# Altium PCB RFFE-Ver1.PcbDoc (part 2 of 2)
Units mm, origin at the board's own origin, x right, y up, seen from the top; angles counter-clockwise.
Board outline 405.96 x 196.35 mm, 6 copper layers (Top Layer, Internal Plane 1, Mid-Layer 1, Mid-Layer 2, Internal Plane 2, Bottom Layer); 512 components, 366 nets, 2013 pads, 0 vias.
Unrouted connection lines stored in the file: 1522.
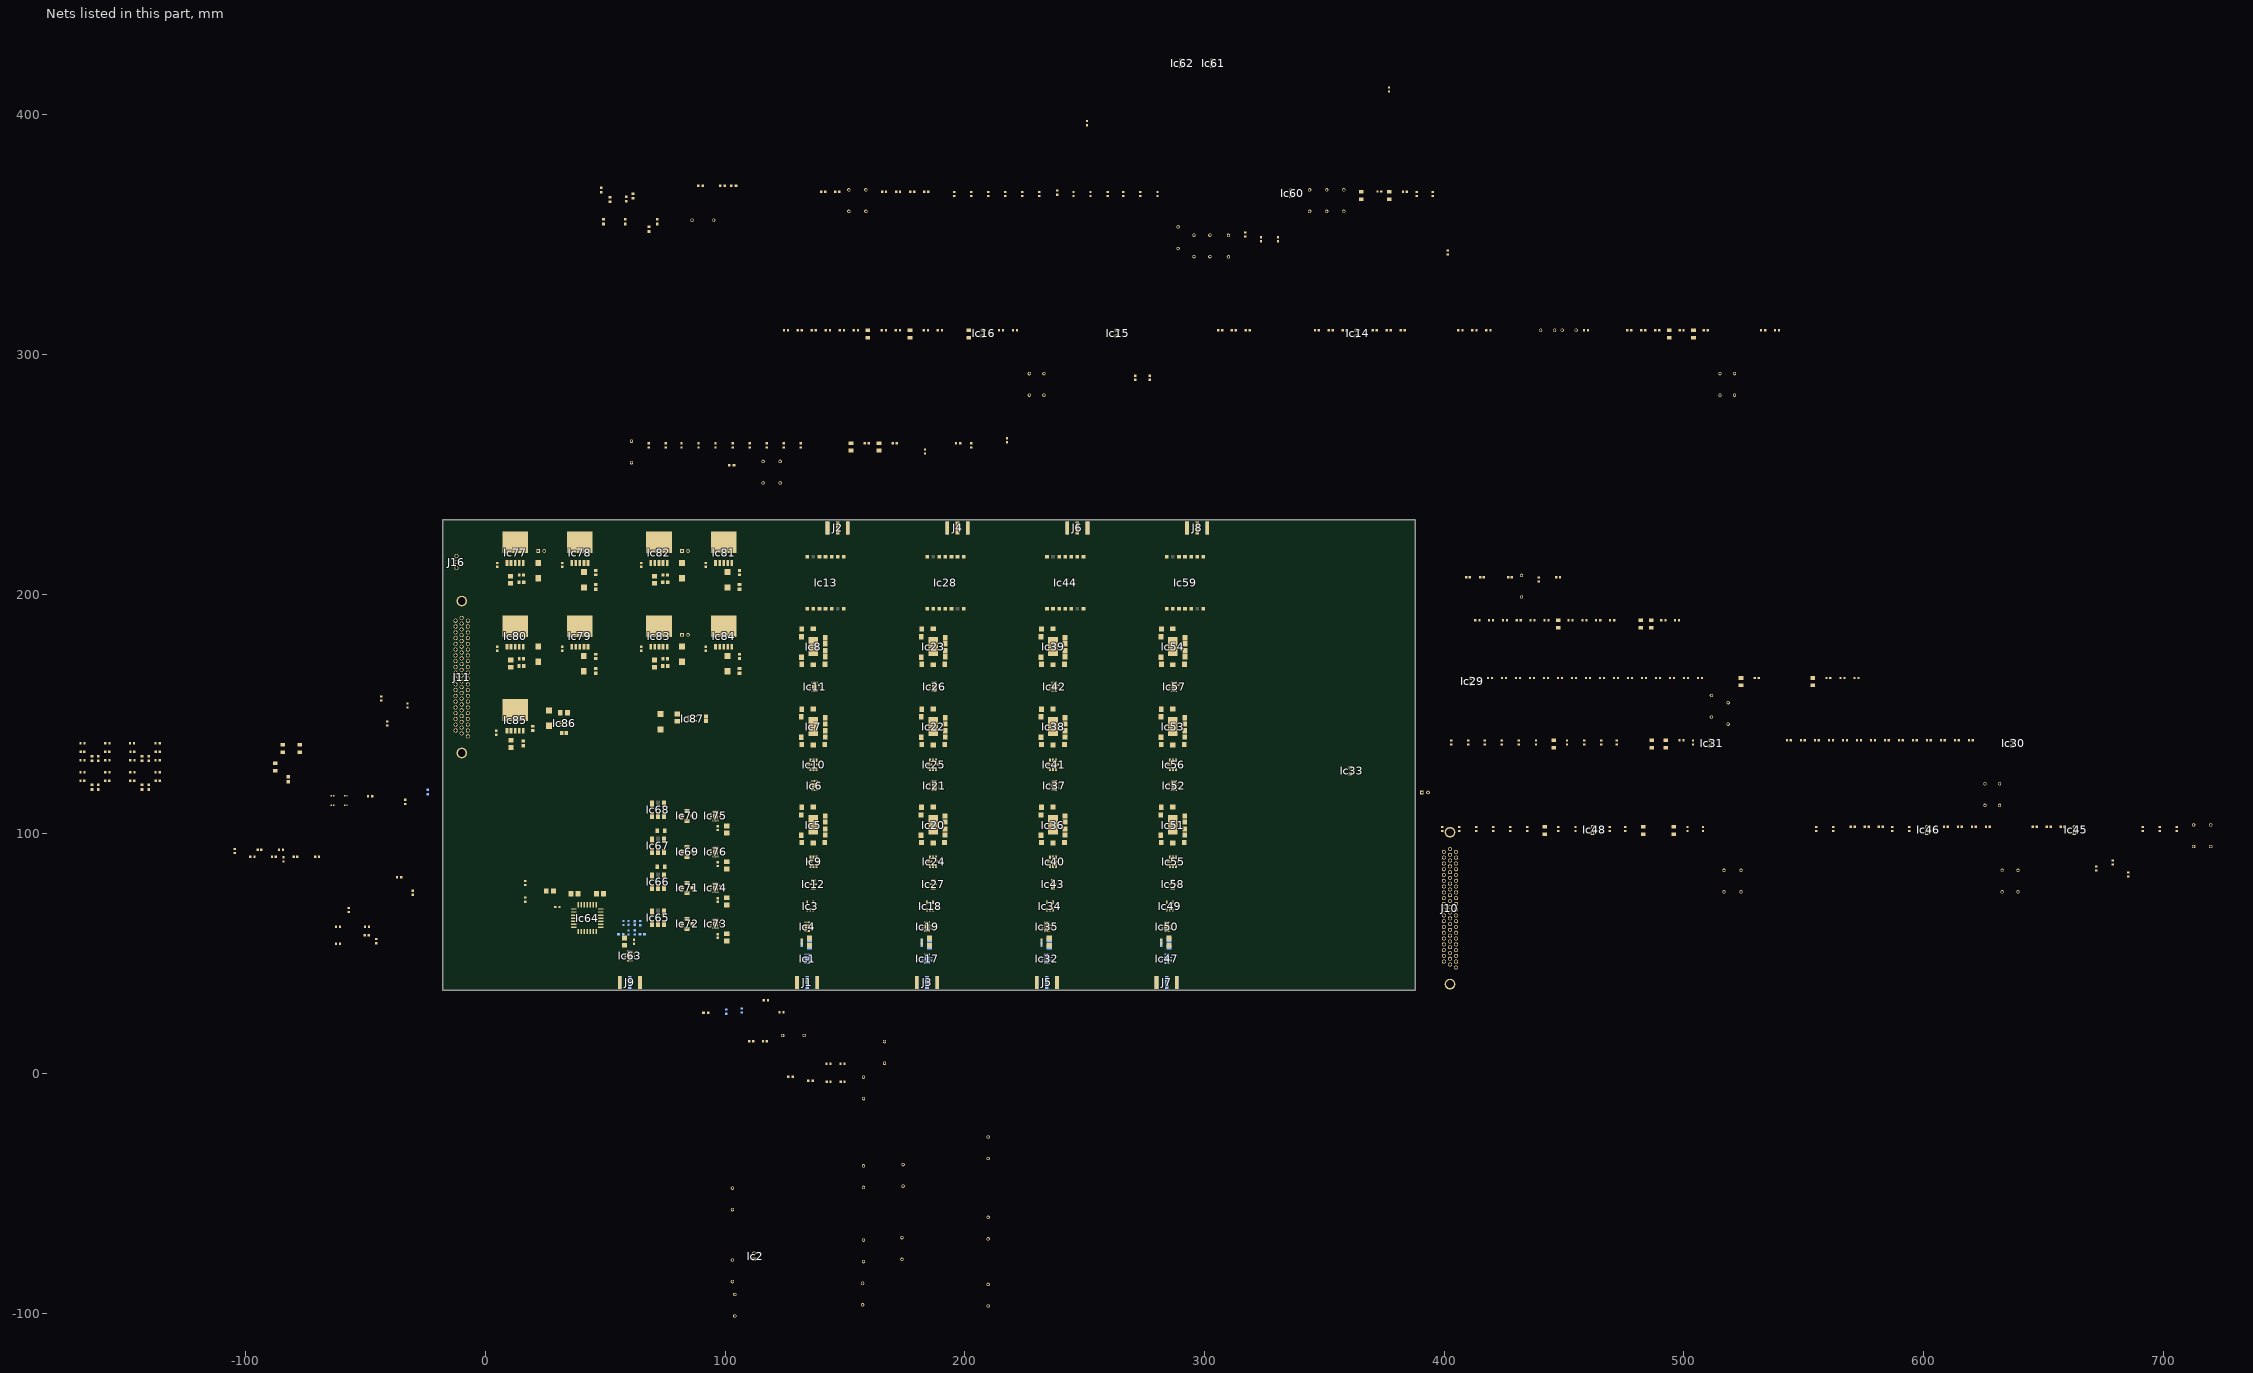
[diagram p4: the nets of this part, all layers, seen from the top]

## Part data
C1 C2 C3 C4 C6 C22 C23 C24 C25 C27 C43 C44 C45 C46 C48 C64 C65 C66 C67 C69: library part GRM31C5C1E104JA01L, "CAP CER 0.1UF 25V 5% NP0 1206"
C5 C7 C20 C21 C26 C28 C41 C42 C47 C49 C62 C63 C68 C70 C82 C84 C94 C104 C105 C106 C107: "CAP CER 100PF 50V 5% NP0 0603"
C8 C9 C10 C11 C12 C13 C14 C15 C16 C17 C29 C30 C31 C32 C33 C34 C35 C36 C37 C38 C50 C51 C52 C53 C54 C55 C56 C57 C58 C59 C72 C73 C74 C75 C76 C77 C78 C79 C80 C81 C87 C88 C89 C90 C91 C92 C96 C97 C98 C99 C100 C101 C102 C103: "CAP CER 47PF 50V 5% NP0 0603"
C18 C19 C39 C40 C60 C61 C71 C83 C85 C86 C93 C95 C108 C109 C110 C111: library part T495B475K016ZTE800, "CAP TANT 4.7UF 16V 10% 1411"
C112 C113 C114 C115 C118 C119 C120 C121 C127 C129: library part T495D336K016ATE150, "CAP TANT 33UF 16V 10% 2917"
C116 C117 C122 C123 C124 C125 C128: library part T520B106M016ATE100, "CAP TANT 10UF 16V 20% 1411"
C126 C130: library part C2012C0G1H103J/0.60, "CAP CER 10000PF 50V 5% NP0 0805"
D1 D2 D3 D4: "DIODE SCHOTTKY SS 30V 100MA 2VMN"
Ic1 Ic4 Ic17 Ic19 Ic32 Ic35 Ic47 Ic50 Ic63 Ic73 Ic74 Ic75 Ic76: library part Minicircuits-HSWA2-30DR+, "Absoptive RF Switch SPDT"
Ic2 Ic14 Ic15 Ic16 Ic29 Ic30 Ic31 Ic33 Ic45 Ic46 Ic48 Ic60 Ic61 Ic62: library part PPG101A1RD
Ic3 Ic18 Ic34 Ic49: library part Minicircuits-SBTC-2-10L, "Power Splitter 2 way"
Ic5 Ic7 Ic8 Ic20 Ic22 Ic23 Ic36 Ic38 Ic39 Ic51 Ic53 Ic54: library part Minicircuits-TAMP-72LN+, "LNA 20 dB Low Noise Figure"
Ic6 Ic11 Ic21 Ic26 Ic37 Ic42 Ic52 Ic57: library part Minicircuits-DAT-31R5-SP+, "Serial Digital Step Attenuator 31.5 step:0.5dB"
Ic9 Ic10 Ic24 Ic25 Ic40 Ic41 Ic55 Ic56: library part TST-TA0568A, "Band Pass Filter FC475MHz 3dB@12MHz"
Ic12 Ic27 Ic43 Ic58: library part Minicircuits-LFCN-530+, "Low Pass Filter 3dB@530MHz"
Ic13 Ic28 Ic44 Ic59: library part Minicircuits-BPF-C495+, "Band Pass Filter FC495MHz 3dB@50MHz"
Ic64: library part Minicircuits-GSWA-4-30DR, "SP4T Absorptive GaAs Switch"
Ic65 Ic66 Ic67 Ic68: library part Minicircuits-ADC-10-4, "Coupler 10 dB"
Ic69: library part Minicircuits-PAT-1+, "Fixed Attenuator 1 dB"
Ic70: library part Minicircuits-PAT-0+, "Fixed Attenuator 0 dB"
Ic71: library part Minicircuits-PAT-2+, "Fixed Attenuator 2 dB"
Ic72: library part Minicircuits-PAT-3+, "Fixed Attenuator 3 dB"
Ic77 Ic78 Ic79 Ic80 Ic81 Ic82 Ic83 Ic84 Ic85: library part LT1764AEQ#PBF
Ic86: "IC LDO REG HI-PSRR 3V SOT23-5"
Ic87: "IC LDO REG NEG LOWNOISE TSOT23-5"
J1 J2 J3 J4 J5 J6 J7 J8 J9: library part 132289RP, "CONN RCPT BLKHD SMA REV POL PCB"
J10 J11: library part 5749639-1, "CONN D-SUB PLUG R/A 62POS 30GOLD"
J12 J13 J14 J15: library part 4-103321-4, "CONN HEADR BRKWAY .100 2POS STR"
J16: library part 1881561, "CONN TERM BLK HDR 2.5MM 3POS"
R1 R2 R3 R4 R5 R6 R7 R8 R9 R10 R11 R12 R13 R14 R37 R38 R39 R40 R41 R42 R45 R46 R47 R48 R51 R52 R53 R54 R55 R56 R57 R58 R59 R60 R61 R62 R63 R64 R84 R85 R86 R87 R88 R89 R95 R96 R97 R98 R99 R100 R101 R102 R103 R104 R105 R106 R107 R108 R109 R110 R111 R112 R135 R136 R137 R138 R139 R140 R143 R144 R145 R146 R149 R150 R151 R152 R153 R154 R155 R156 R157 R158 R159 R160 R161 R162 R184 R185 R186 R187 R188 R189 R193 R194 R195 R196 R201 R202 R203 R205 R213 R214 R215 R216 R217 R218 R241 R242 R243 R244 R245 R246 R247 R248: "RES 10K OHM .15W 0.1% 0603 SMD"
R15 R16 R17 R25 R26 R34 R35 R36 R43 R44 R49 R50 R68 R69 R70 R72 R73 R90 R91 R92 R93 R94 R115 R116 R117 R120 R121 R132 R133 R134 R141 R142 R147 R148 R167 R168 R169 R170 R171 R172 R173 R190 R191 R192: "RES 46.4 OHM 1% 50PPM 1/2W"
R18 R19 R20 R21 R65 R66 R67 R71 R113 R114 R118 R119 R163 R164 R165 R166 R204 R206 R225 R226 R227 R228 R229 R230 R231 R232: library part ERJ-3GEY0R00V, "RES 0.0 OHM 1/10W 0603 SMD"
R22 R23 R24 R27 R28 R29 R30 R31 R32 R33 R74 R75 R76 R77 R78 R79 R80 R81 R82 R83 R122 R123 R124 R125 R126 R127 R128 R129 R130 R131 R174 R175 R176 R177 R178 R179 R180 R181 R182 R183 R207 R208 R209 R210 R211 R212 R233 R234 R235 R236 R237 R238 R239 R240: "RES 100 OHM 125MW .1% 0603 SMD"
R197 R198 R199 R200: "RES 10 OHM 1/10W 5% 0603 SMD"
R219: library part ERJ-6ENF1000V, "RES 100 OHM 1/8W 1% 0805 SMD"
R220 R221 R222 R223 R224: library part CHF1206CNT500LW, "RES 50 OHM 20W 5% 1206 SMD"
R249 R250 R251 R252 R261 R262 R263 R264 R273: "RES 0.0 OHM 1/10W 0603 SMD"
R253 R254 R255 R256 R265 R266 R267 R268 R274: library part ERA-6AEB472V, "RES 4.7K OHM 1/8W .1% 0805 SMD"
R257 R259 R269 R271 R275: library part ERA-6AEB102V, "RES 1.0K OHM 1/8W .1% 0805 SMD"
R258 R260 R270 R272: library part ERA-6AEB152V, "RES 1.5K OHM 1/8W .1% 0805 SMD"

## Nets (pads, with @x,y where several pads share a name; then routed paths per layer and width w, separated by ;. In a path a pad name is that pad's centre, name@x,y a point inside that pad or via, vN(x,y) a via of type N, cw(c..) or ccw(c..) an arc to the next point about the centre after c; other vN are vias at no path point)
3VGND: C1.1 C2.1 C3.1 C4.2 C5.2 C6.2 C7.2 C8.2 C9.2 C10.2 C11.2 C12.2 C13.2 C14.1 C17.1 C18.2 C19.2 C20.2 C21.2 C22.1 C23.1 C24.1 C25.2 C26.2 C27.2 C28.2 C29.2 C30.2 C31.2 C32.2 C33.2 C34.2 C36.1 C37.1 C39.2 C40.2 C41.2 C42.2 C43.1 C44.1 C45.1 C46.2 C47.2 C48.2 C49.2 C50.2 C51.2 C52.2 C53.2 C54.2 C55.2 C56.1 C59.1 C60.2 C61.2 C62.2 C63.2 C64.1 C65.1 C66.1 C67.2 C68.2 C69.2 C70.2 C71.2 C72.2 C73.2 C74.2 C75.1 C77.2 C78.2 C79.2 C81.1 C82.2 C83.2 C84.2 C85.2 C86.1 C87.2 C88.2 C89.2 C93.2 C94.2 C95.2 C96.2 C97.2 C98.2 C99.2 C100.2 C101.2 C102.2 C103.2 C104.2 C105.2 C106.2 C107.2 C108.2 C109.2 C110.2 C111.2 C112.2 C113.2 C114.2 C115.2 C116.2 C117.2 C118.2 C119.2 C120.2 C121.2 C122.2 C123.2 C124.1 C125.2 C127.1 C128.2 C129.2 C130.2 Ic1.1 Ic1.2 Ic1.4 Ic1.5 Ic1.6 Ic1.7 Ic1.9 Ic1.10 Ic1.11 Ic1.12 Ic1.14 Ic1.15 Ic1.19 Ic1.21 Ic3.1 Ic3.2 Ic4.1 Ic4.2 Ic4.4 Ic4.5 Ic4.6 Ic4.7 Ic4.9 Ic4.10 Ic4.11 Ic4.12 Ic4.14 Ic4.15 Ic4.19 Ic4.21 Ic5.1 Ic5.2 Ic5.3 Ic5.4 Ic5.6 Ic5.8 Ic5.9 Ic5.11 Ic5.12 Ic6.10 Ic6.11 Ic6.12 Ic6.18 Ic6.21 Ic7.1 Ic7.2 Ic7.3 Ic7.4 Ic7.6 Ic7.8 Ic7.9 Ic7.11 Ic7.12 Ic8.1 Ic8.2 Ic8.3 Ic8.4 Ic8.6 Ic8.8 Ic8.9 Ic8.11 Ic8.12 Ic9.1 Ic9.3 Ic9.4 Ic9.5 Ic9.7 Ic9.8 Ic10.1 Ic10.3 Ic10.4 Ic10.5 Ic10.7 Ic10.8 Ic11.10 Ic11.11 Ic11.12 Ic11.18 Ic11.21 Ic12.2 Ic12.4 Ic13.1 Ic13.3 Ic13.4 Ic13.5 Ic13.7 Ic13.8 Ic13.10 Ic13.11 Ic13.12 Ic13.14 Ic17.1 Ic17.2 Ic17.4 Ic17.5 Ic17.6 Ic17.7 Ic17.9 Ic17.10 Ic17.11 Ic17.12 Ic17.14 Ic17.15 Ic17.19 Ic17.21 Ic18.1 Ic18.2 Ic19.1 Ic19.2 Ic19.4 Ic19.5 Ic19.6 Ic19.7 Ic19.9 Ic19.10 Ic19.11 Ic19.12 Ic19.14 Ic19.15 Ic19.19 Ic19.21 Ic20.1 Ic20.2 Ic20.3 Ic20.4 Ic20.6 Ic20.8 Ic20.9 Ic20.11 Ic20.12 Ic21.10 Ic21.11 Ic21.12 Ic21.18 Ic21.21 Ic22.1 Ic22.2 Ic22.3 Ic22.4 Ic22.6 Ic22.8 Ic22.9 Ic22.11 Ic22.12 Ic23.1 Ic23.2 Ic23.3 Ic23.4 Ic23.6 Ic23.8 Ic23.9 Ic23.11 Ic23.12 Ic24.1 Ic24.3 Ic24.4 Ic24.5 Ic24.7 Ic24.8 Ic25.1 Ic25.3 Ic25.4 Ic25.5 Ic25.7 Ic25.8 Ic26.10 Ic26.11 Ic26.12 Ic26.18 Ic26.21 Ic27.2 Ic27.4 Ic28.1 Ic28.3 Ic28.4 Ic28.5 Ic28.7 Ic28.8 Ic28.10 Ic28.11 Ic28.12 Ic28.14 Ic32.1 Ic32.2 Ic32.4 Ic32.5 Ic32.6 Ic32.7 Ic32.9 Ic32.10 Ic32.11 Ic32.12 Ic32.14 Ic32.15 Ic32.19 Ic32.21 Ic34.1 Ic34.2 Ic35.1 Ic35.2 Ic35.4 Ic35.5 Ic35.6 Ic35.7 Ic35.9 Ic35.10 Ic35.11 Ic35.12 Ic35.14 Ic35.15 Ic35.19 Ic35.21 Ic37.10 Ic37.11 Ic37.12 Ic37.18 Ic37.21 Ic38.1 Ic38.2 Ic38.3 Ic38.4 Ic38.6 Ic38.8 Ic38.9 Ic38.11 Ic38.12 Ic39.1 Ic39.2 Ic39.3 Ic39.4 Ic39.6 Ic39.8 Ic39.9 Ic39.11 Ic39.12 Ic40.1 Ic40.3 Ic40.4 Ic40.5 Ic40.7 Ic40.8 Ic41.1 Ic41.3 Ic41.4 Ic41.5 Ic41.7 Ic41.8 Ic42.10 Ic42.11 Ic42.12 Ic42.18 Ic42.21 Ic43.2 Ic43.4 Ic44.1 Ic44.3 Ic44.4 Ic44.5 Ic44.7 Ic44.8 Ic44.10 Ic44.11 Ic44.12 Ic44.14 Ic47.1 Ic47.2 Ic47.4 Ic47.5 Ic47.6 Ic47.7 Ic47.9 Ic47.10 Ic47.11 Ic47.12 Ic47.14 Ic47.15 Ic47.19 Ic47.21 Ic49.1 Ic49.2 Ic50.1 Ic50.2 Ic50.4 Ic50.5 Ic50.6 Ic50.7 Ic50.9 Ic50.10 Ic50.11 Ic50.12 Ic50.14 Ic50.15 Ic50.19 Ic50.21 Ic51.1 Ic51.2 Ic51.3 Ic51.4 Ic51.6 Ic51.8 Ic51.9 Ic51.11 Ic51.12 Ic52.10 Ic52.11 Ic52.12 Ic52.18 Ic52.21 Ic53.1 Ic53.2 Ic53.3 Ic53.4 Ic53.6 Ic53.8 Ic53.9 Ic53.11 Ic53.12 Ic54.1 Ic54.2 Ic54.3 Ic54.4 Ic54.6 Ic54.8 Ic54.9 Ic54.11 Ic54.12 Ic55.1 Ic55.3 Ic55.4 Ic55.5 Ic55.7 Ic55.8 Ic56.1 Ic56.3 Ic56.4 Ic56.5 Ic56.7 Ic56.8 Ic57.10 Ic57.11 Ic57.12 Ic57.18 Ic57.21 Ic58.2 Ic58.4 Ic59.1 Ic59.3 Ic59.4 Ic59.5 Ic59.7 Ic59.8 Ic59.10 Ic59.11 Ic59.12 Ic59.14 Ic63.1 Ic63.2 Ic63.4 Ic63.5 Ic63.6 Ic63.7 Ic63.9 Ic63.10 Ic63.11 Ic63.12 Ic63.14 Ic63.15 Ic63.18 Ic63.19 Ic63.21 Ic64.2 Ic64.3 Ic64.4 Ic64.6 Ic64.7 Ic64.8 Ic64.10 Ic64.11 Ic64.17 Ic64.19 Ic64.20 Ic64.22 Ic64.23 Ic64.24 Ic64.26 Ic64.27 Ic64.28 Ic65.2 Ic66.2 Ic67.2 Ic68.2 Ic69.2 Ic69.4 Ic70.2 Ic70.4 Ic71.2 Ic71.4 Ic72.2 Ic72.4 Ic73.1 Ic73.2 Ic73.4 Ic73.5 Ic73.6 Ic73.7 Ic73.9 Ic73.10 Ic73.11 Ic73.12 Ic73.14 Ic73.15 Ic73.18 Ic73.19 Ic73.21 Ic74.1 Ic74.2 Ic74.4 Ic74.5 Ic74.6 Ic74.7 Ic74.9 Ic74.10 Ic74.11 Ic74.12 Ic74.14 Ic74.15 Ic74.18 Ic74.19 Ic74.21 Ic75.1 Ic75.2 Ic75.4 Ic75.5 Ic75.6 Ic75.7 Ic75.9 Ic75.10 Ic75.11 Ic75.12 Ic75.14 Ic75.15 Ic75.18 Ic75.19 Ic75.21 Ic76.1 Ic76.2 Ic76.4 Ic76.5 Ic76.6 Ic76.7 Ic76.9 Ic76.10 Ic76.11 Ic76.12 Ic76.14 Ic76.15 Ic76.18 Ic76.19 Ic76.21 Ic77.3 Ic77.6 Ic78.3 Ic78.6 Ic79.3 Ic79.6 Ic80.3 Ic80.6 Ic81.3 Ic81.6 Ic82.3 Ic82.6 Ic83.3 Ic83.6 Ic84.3 Ic84.6 Ic85.3 Ic85.6 Ic86.2 Ic87.1 J1.1 J1.2 J1.3 J1.4 J2.1 J2.2 J2.3 J2.4 J3.1 J3.2 J3.3 J3.4 J4.1 J4.2 J4.3 J4.4 J5.1 J5.2 J5.3 J5.4 J6.1 J6.2 J6.3 J6.4 J7.1 J7.2 J7.3 J7.4 J8.1 J8.2 J8.3 J8.4 J9.1 J9.2 J9.3 J9.4 J11.1 J11.6 J11.11 J11.16 J11.21 J11.22 J11.27 J11.32 J11.37 J11.42 J11.57 J11.58 J11.59 J11.60 J11.61 J11.62 J11.63 J11.64 J12.2 J13.2 J14.2 J15.2 J16.2 R1.1 R2.1 R3.1 R4.1 R5.1 R7.1 R8.1 R9.1 R12.1 R37.1 R38.1 R39.1 R40.1 R41.1 R42.1 R45.1 R48.1 R51.1 R52.1 R53.1 R54.1 R55.1 R57.1 R58.1 R59.1 R62.1 R84.1 R85.1 R86.1 R87.1 R88.1 R89.1 R96.1 R97.1 R99.1 R100.1 R101.1 R102.1 R103.1 R105.1 R106.1 R107.1 R110.1 R135.1 R136.1 R137.1 R138.1 R139.1 R140.1 R143.1 R146.1 R149.1 R150.1 R151.1 R152.1 R153.1 R155.1 R156.1 R157.1 R160.1 R184.1 R185.1 R186.1 R187.1 R188.1 R189.1 R193.1 R196.1 R213.1 R214.1 R215.1 R220.1 R221.1 R222.2 R223.2 R224.2 R241.1 R242.1 R243.1 R244.1 R245.1 R246.1 R247.1 R248.1 R257.2 R258.2 R259.2 R260.2 R269.2 R270.2 R271.2 R272.2 R275.2
+3V: C4.1 C5.1 C6.1 C7.1 C15.1 C16.1 C18.1 C19.1 C20.1 C21.1 C25.1 C26.1 C27.1 C28.1 C35.1 C38.1 C39.1 C40.1 C41.1 C42.1 C46.1 C47.1 C48.1 C49.1 C57.1 C58.1 C60.1 C61.1 C62.1 C63.1 C67.1 C68.1 C69.1 C70.1 C71.1 C76.1 C80.1 C82.1 C83.1 C84.1 C93.1 C94.1 C104.1 C105.1 C106.1 C107.1 C108.1 C109.1 C110.1 C111.1 C125.1 Ic1.20 Ic4.20 Ic6.6 Ic6.9 Ic6.13 Ic11.6 Ic11.9 Ic11.13 Ic17.20 Ic19.20 Ic21.6 Ic21.9 Ic21.13 Ic26.6 Ic26.9 Ic26.13 Ic32.20 Ic35.20 Ic37.6 Ic37.9 Ic37.13 Ic42.6 Ic42.9 Ic42.13 Ic47.20 Ic50.20 Ic52.6 Ic52.9 Ic52.13 Ic57.6 Ic57.9 Ic57.13 Ic63.20 Ic73.20 Ic74.20 Ic75.20 Ic76.20 Ic86.5 R6.1 R10.1 R11.1 R46.1 R47.1 R56.1 R60.1 R61.1 R95.1 R98.1 R104.1 R108.1 R109.1 R144.1 R145.1 R154.1 R158.1 R159.1 R194.1 R195.1
+5V: C129.1 Ic85.4 Ic86.1 Ic86.3 R274.1
A+5V: C1.2 C2.2 C3.2 C22.2 C23.2 C24.2 C43.2 C44.2 C45.2 C64.2 C65.2 C66.2 C113.1 Ic5.7 Ic7.7 Ic8.7 Ic20.7 Ic22.7 Ic23.7 Ic36.7 Ic38.7 Ic39.7 Ic51.7 Ic53.7 Ic54.7 Ic78.4 R254.1
B+5V: C119.1 Ic81.4 R266.1
C+5V: C115.1 Ic79.4 R256.1
D+5V: C121.1 Ic84.4 R268.1
E+5V: C85.1 Ic64.12 R197.1 R198.1 R199.1 R200.1 R219.1
E-5V: C86.2 C126.1 C127.2 Ic64.18 Ic87.5
NetC8_1: C8.1 R22.1
NetC9_1: C9.1 R23.1
NetC10_1: C10.1 R24.1
NetC11_1: C11.1 R27.1
NetC12_1: C12.1 R28.1
NetC13_1: C13.1 R29.1
NetC14_2: C14.2 R30.1
NetC15_2: C15.2 R31.1
NetC16_2: C16.2 R32.1
NetC17_2: C17.2 R33.1
NetC29_1: C29.1 R74.1
NetC30_1: C30.1 R75.1
NetC31_1: C31.1 R76.1
NetC32_1: C32.1 R77.1
NetC33_1: C33.1 R78.1
NetC34_1: C34.1 R79.1
NetC35_2: C35.2 R80.1
NetC36_2: C36.2 R81.1
NetC37_2: C37.2 R82.1
NetC38_2: C38.2 R83.1
NetC50_1: C50.1 R122.1
NetC51_1: C51.1 R123.1
NetC52_1: C52.1 R124.1
NetC53_1: C53.1 R125.1
NetC54_1: C54.1 R126.1
NetC55_1: C55.1 R127.1
NetC56_2: C56.2 R128.1
NetC57_2: C57.2 R129.1
NetC58_2: C58.2 R130.1
NetC59_2: C59.2 R131.1
NetC72_1: C72.1 R174.1
NetC73_1: C73.1 R175.1
NetC74_1: C74.1 R176.1
NetC75_2: C75.2 R180.1
NetC76_2: C76.2 R181.1
NetC77_1: C77.1 R177.1
NetC78_1: C78.1 R178.1
NetC79_1: C79.1 R179.1
NetC80_2: C80.2 R182.1
NetC81_2: C81.2 R183.1
NetC87_1: C87.1 R207.1
NetC88_1: C88.1 R208.1
NetC89_1: C89.1 R209.1
NetC90_1: C90.1 R210.1
NetC90_2: C90.2 C91.2 C92.2 C95.1 R216.1 R217.1 R218.1 R219.2
NetC91_1: C91.1 R211.1
NetC92_1: C92.1 R212.1
NetC96_1: C96.1 R233.1
NetC97_1: C97.1 R234.1
NetC98_1: C98.1 R235.1
NetC99_1: C99.1 R236.1
NetC100_1: C100.1 R237.1
NetC101_1: C101.1 R238.1
NetC102_1: C102.1 R239.1
NetC103_1: C103.1 R240.1
NetC112_1: C112.1 Ic77.4 Ic78.2 J13.1 R250.2 R253.1
NetC114_1: C114.1 Ic79.2 Ic80.4 J12.1 R252.2 R255.1
NetC116_1: C116.1 C117.1 C122.1 C123.1 C128.1 Ic77.2 Ic80.2 Ic82.2 Ic83.2 Ic85.2 J16.1 R249.2 R251.2 R261.2 R263.2 R273.2
NetC118_1: C118.1 Ic81.2 Ic82.4 J15.1 R262.2 R265.1
NetC120_1: C120.1 Ic83.4 Ic84.2 J14.1 R264.2 R267.1
NetC124_2: C124.2 Ic87.2 Ic87.3 J16.3
NetC126_2: C126.2 Ic87.4
NetC130_1: C130.1 Ic86.4
NetD1_1: D1.1 Ic64.14 R205.2 R209.2 R215.2
NetD1_2: D1.2 R198.2
NetD2_1: D2.1 Ic64.13 R203.2 R210.2 R216.2
NetD2_2: D2.2 R197.2
NetD3_1: D3.1 Ic64.16 R202.2 R211.2 R217.2
NetD3_2: D3.2 R199.2
NetD4_1: D4.1 Ic64.15 R201.2 R212.2 R218.2
NetD4_2: D4.2 R200.2
NetIc1_3: Ic1.3 Ic19.13
NetIc1_8: Ic1.8 J1.5
NetIc1_13: Ic1.13 Ic4.13 Ic35.13
NetIc1_16: Ic1.16 R18.1 R30.2 R45.2
NetIc1_17: Ic1.17 R20.1 R31.2 R46.2
NetIc2_1: Ic2.1 J10.27
NetIc2_2: Ic2.2 J10.26
NetIc2_3: Ic2.3 J10.28
NetIc3_3: Ic3.3 Ic4.8
NetIc3_4: Ic3.4 Ic73.8
NetIc3_6: Ic3.6 Ic12.1
NetIc4_3: Ic4.3 Ic17.13
NetIc4_16: Ic4.16 R21.2 R32.2 R47.2
NetIc4_17: Ic4.17 R19.2 R33.2 R48.2
NetIc5_5: Ic5.5 Ic6.2
NetIc5_10: Ic5.10 Ic9.6
NetIc6_1: Ic6.1 R11.2
NetIc6_3: Ic6.3 R13.2
NetIc6_4: Ic6.4 Ic11.4 J11.26 R23.2 R28.2 R38.2 R41.2
NetIc6_5: Ic6.5 Ic11.5 J11.25 R24.2 R29.2 R39.2 R42.2
NetIc6_14: Ic6.14 Ic10.2
NetIc6_15: Ic6.15 R9.2
NetIc6_16: Ic6.16 R7.2
NetIc6_17: Ic6.17 R5.2
NetIc6_19: Ic6.19 R3.2
NetIc6_20: Ic6.20 R1.2
NetIc7_5: Ic7.5 Ic11.2
NetIc7_10: Ic7.10 Ic10.6
NetIc8_5: Ic8.5 Ic13.2
NetIc8_10: Ic8.10 Ic11.14
NetIc9_2: Ic9.2 Ic12.3
NetIc11_1: Ic11.1 R12.2
NetIc11_3: Ic11.3 R14.2
NetIc11_15: Ic11.15 R10.2
NetIc11_16: Ic11.16 R8.2
NetIc11_17: Ic11.17 R6.2
NetIc11_19: Ic11.19 R4.2
NetIc11_20: Ic11.20 R2.2
NetIc13_9: Ic13.9 J2.5
NetIc14_1: Ic14.1 J10.24
NetIc14_2: Ic14.2 J10.23
NetIc14_3: Ic14.3 J10.25
NetIc15_1: Ic15.1 J10.30
NetIc15_2: Ic15.2 J10.29
NetIc15_3: Ic15.3 J10.31
NetIc16_1: Ic16.1 J10.44
NetIc16_2: Ic16.2 J10.43
NetIc16_3: Ic16.3 J10.45
NetIc17_3: Ic17.3 Ic19.3
NetIc17_8: Ic17.8 J3.5
NetIc17_16: Ic17.16 R66.1 R80.2 R95.2
NetIc17_17: Ic17.17 R67.1 R81.2 R96.2
NetIc18_3: Ic18.3 Ic19.8
NetIc18_4: Ic18.4 Ic76.8
NetIc18_6: Ic18.6 Ic27.1
NetIc19_16: Ic19.16 R71.2 R82.2 R97.2
NetIc19_17: Ic19.17 R65.2 R83.2 R98.2
NetIc20_5: Ic20.5 Ic21.2
NetIc20_10: Ic20.10 Ic24.6
NetIc21_1: Ic21.1 R61.2
NetIc21_3: Ic21.3 R63.2
NetIc21_4: Ic21.4 Ic26.4 J11.31 R75.2 R78.2 R85.2 R88.2
NetIc21_5: Ic21.5 Ic26.5 J11.30 R76.2 R79.2 R86.2 R89.2
NetIc21_14: Ic21.14 Ic25.2
NetIc21_15: Ic21.15 R59.2
NetIc21_16: Ic21.16 R57.2
NetIc21_17: Ic21.17 R55.2
NetIc21_19: Ic21.19 R53.2
NetIc21_20: Ic21.20 R51.2
NetIc22_5: Ic22.5 Ic26.2
NetIc22_10: Ic22.10 Ic25.6
NetIc23_5: Ic23.5 Ic28.2
NetIc23_10: Ic23.10 Ic26.14
NetIc24_2: Ic24.2 Ic27.3
NetIc26_1: Ic26.1 R62.2
NetIc26_3: Ic26.3 R64.2
NetIc26_15: Ic26.15 R60.2
NetIc26_16: Ic26.16 R58.2
NetIc26_17: Ic26.17 R56.2
NetIc26_19: Ic26.19 R54.2
NetIc26_20: Ic26.20 R52.2
NetIc28_9: Ic28.9 J4.5
NetIc29_1: Ic29.1 J10.48
NetIc29_2: Ic29.2 J10.47
NetIc29_3: Ic29.3 J10.49
NetIc30_1: Ic30.1 J10.33
NetIc30_2: Ic30.2 J10.32
NetIc30_3: Ic30.3 J10.34
NetIc31_1: Ic31.1 J10.51
NetIc31_2: Ic31.2 J10.50
NetIc31_3: Ic31.3 J10.52
NetIc32_3: Ic32.3 Ic50.13
NetIc32_8: Ic32.8 J5.5
NetIc32_13: Ic32.13
NetIc32_16: Ic32.16 R114.1
NetIc32_17: Ic32.17 R118.1
NetIc33_1: Ic33.1 J10.19
NetIc33_2: Ic33.2 Ic33.3 J10.39
NetIc34_3: Ic34.3 Ic35.8
NetIc34_4: Ic34.4 Ic74.8
NetIc34_6: Ic34.6 Ic43.1
NetIc35_3: Ic35.3 Ic47.13
NetIc35_16: Ic35.16 R119.2 R130.2 R145.2
NetIc35_17: Ic35.17 R113.2 R131.2 R146.2
NetIc36_1: Ic36.1 Ic36.2 Ic36.3 Ic36.4 Ic36.6 Ic36.8 Ic36.9 Ic36.11 Ic36.12
NetIc36_5: Ic36.5 Ic37.2
NetIc36_10: Ic36.10 Ic40.6
NetIc37_1: Ic37.1 R109.2
NetIc37_3: Ic37.3 R111.2
NetIc37_4: Ic37.4 Ic42.4 J11.36 R123.2 R126.2 R136.2 R139.2
NetIc37_5: Ic37.5 Ic42.5 J11.35 R124.2 R127.2 R137.2 R140.2
NetIc37_14: Ic37.14 Ic41.2
NetIc37_15: Ic37.15 R107.2
NetIc37_16: Ic37.16 R105.2
NetIc37_17: Ic37.17 R103.2
NetIc37_19: Ic37.19 R101.2
NetIc37_20: Ic37.20 R99.2
NetIc38_5: Ic38.5 Ic42.2
NetIc38_10: Ic38.10 Ic41.6
NetIc39_5: Ic39.5 Ic44.2
NetIc39_10: Ic39.10 Ic42.14
NetIc40_2: Ic40.2 Ic43.3
NetIc42_1: Ic42.1 R110.2
NetIc42_3: Ic42.3 R112.2
NetIc42_15: Ic42.15 R108.2
NetIc42_16: Ic42.16 R106.2
NetIc42_17: Ic42.17 R104.2
NetIc42_19: Ic42.19 R102.2
NetIc42_20: Ic42.20 R100.2
NetIc44_9: Ic44.9 J6.5
NetIc45_1: Ic45.1 J10.38
NetIc45_2: Ic45.2 J10.17
NetIc45_3: Ic45.3 J10.18
NetIc46_1: Ic46.1 J10.41
NetIc46_2: Ic46.2 J10.20
NetIc46_3: Ic46.3 J10.21
NetIc47_3: Ic47.3 Ic50.3
NetIc47_8: Ic47.8 J7.5
NetIc47_16: Ic47.16 R164.1 R182.2 R195.2
NetIc47_17: Ic47.17 R165.1 R183.2 R196.2
NetIc48_1: Ic48.1 J10.36
NetIc48_2: Ic48.2 J10.35
NetIc48_3: Ic48.3 J10.37
NetIc49_3: Ic49.3 Ic50.8
NetIc49_4: Ic49.4 Ic75.8
NetIc49_6: Ic49.6 Ic58.1
NetIc50_16: Ic50.16 R166.2 R180.2 R193.2
NetIc50_17: Ic50.17 R163.2 R181.2 R194.2
NetIc51_5: Ic51.5 Ic52.2
NetIc51_10: Ic51.10 Ic55.6
NetIc52_1: Ic52.1 R159.2
NetIc52_3: Ic52.3 R161.2
NetIc52_4: Ic52.4 Ic57.4 J11.41 R175.2 R178.2 R185.2 R188.2
NetIc52_5: Ic52.5 Ic57.5 J11.40 R176.2 R179.2 R186.2 R189.2
NetIc52_14: Ic52.14 Ic56.2
NetIc52_15: Ic52.15 R157.2
NetIc52_16: Ic52.16 R155.2
NetIc52_17: Ic52.17 R153.2
NetIc52_19: Ic52.19 R151.2
NetIc52_20: Ic52.20 R149.2
NetIc53_5: Ic53.5 Ic57.2
NetIc53_10: Ic53.10 Ic56.6
NetIc54_5: Ic54.5 Ic59.2
NetIc54_10: Ic54.10 Ic57.14
NetIc55_2: Ic55.2 Ic58.3
NetIc57_1: Ic57.1 R160.2
NetIc57_3: Ic57.3 R162.2
NetIc57_15: Ic57.15 R158.2
NetIc57_16: Ic57.16 R156.2
NetIc57_17: Ic57.17 R154.2
NetIc57_19: Ic57.19 R152.2
NetIc57_20: Ic57.20 R150.2
NetIc59_9: Ic59.9 J8.5
NetIc60_1: Ic60.1 J10.57
NetIc60_2: Ic60.2 J10.54
NetIc60_3: Ic60.3 J10.55
NetIc61_1: Ic61.1 J10.61
NetIc61_2: Ic61.2 J10.60
NetIc61_3: Ic61.3 J10.62
NetIc62_1: Ic62.1 J10.56
NetIc62_2: Ic62.2 J10.58
NetIc62_3: Ic62.3 J10.59
NetIc63_3: Ic63.3 Ic64.1
NetIc63_8: Ic63.8 J9.5
NetIc63_13: Ic63.13 Ic65.1
NetIc63_16: Ic63.16 R206.2 R207.2 R213.2
NetIc63_17: Ic63.17 R204.2 R208.2 R214.2
NetIc64_5: Ic64.5 Ic75.3
NetIc64_9: Ic64.9 Ic76.3
NetIc64_21: Ic64.21 Ic74.3
NetIc64_25: Ic64.25 Ic73.3
NetIc65_3: Ic65.3 Ic72.1
NetIc65_4: Ic65.4 R222.1
NetIc65_6: Ic65.6 Ic66.1
NetIc66_3: Ic66.3 Ic71.1
NetIc66_4: Ic66.4 R223.1
NetIc66_6: Ic66.6 Ic67.1
NetIc67_3: Ic67.3 Ic69.1
NetIc67_4: Ic67.4 R224.1
NetIc67_6: Ic67.6 Ic68.1
NetIc68_3: Ic68.3 Ic70.1
NetIc68_4: Ic68.4 R221.2
NetIc68_6: Ic68.6 R220.2
NetIc69_3: Ic69.3 Ic76.13
NetIc70_3: Ic70.3 Ic75.13
NetIc71_3: Ic71.3 Ic74.13
NetIc72_3: Ic72.3 Ic73.13
NetIc73_16: Ic73.16 R231.1 R233.2 R241.2
NetIc73_17: Ic73.17 R227.1 R234.2 R242.2
NetIc74_16: Ic74.16 R229.1 R235.2 R243.2
NetIc74_17: Ic74.17 R225.1 R236.2 R244.2
NetIc75_16: Ic75.16 R232.1 R237.2 R245.2
NetIc75_17: Ic75.17 R228.1 R238.2 R246.2
NetIc76_16: Ic76.16 R230.1 R239.2 R247.2
NetIc76_17: Ic76.17 R226.1 R240.2 R248.2
NetIc77_1: Ic77.1 R249.1
NetIc77_5: Ic77.5 R253.2 R257.1
NetIc78_1: Ic78.1 R250.1
NetIc78_5: Ic78.5 R254.2 R258.1
NetIc79_1: Ic79.1 R252.1
NetIc79_5: Ic79.5 R256.2 R260.1
NetIc80_1: Ic80.1 R251.1
NetIc80_5: Ic80.5 R255.2 R259.1
NetIc81_1: Ic81.1 R262.1
NetIc81_5: Ic81.5 R266.2 R270.1
NetIc82_1: Ic82.1 R261.1
NetIc82_5: Ic82.5 R265.2 R269.1
NetIc83_1: Ic83.1 R263.1
NetIc83_5: Ic83.5 R267.2 R271.1
NetIc84_1: Ic84.1 R264.1
NetIc84_5: Ic84.5 R268.2 R272.1
NetIc85_1: Ic85.1 R273.1
NetIc85_5: Ic85.5 R274.2 R275.1
NetJ10_3: J10.3 R49.2 R50.2
NetJ10_4: J10.4 R15.2 R16.2 R17.2 R34.2 R35.2 R36.2
NetJ10_5: J10.5 R25.2 R26.2 R43.2 R44.2
NetJ10_7: J10.7 R68.2 R69.2 R70.2 R90.2 R91.2 R92.2
NetJ10_8: J10.8 R72.2 R73.2 R93.2 R94.2
NetJ10_10: J10.10 R147.2 R148.2
NetJ10_11: J10.11 R115.2 R116.2 R117.2 R132.2 R133.2 R134.2
NetJ10_12: J10.12 R120.2 R121.2 R141.2 R142.2
NetJ10_14: J10.14 R167.2 R168.2 R169.2 R190.2 R191.2 R192.2
NetJ10_15: J10.15 R170.2 R171.2 R172.2 R173.2
NetJ10_40: J10.40
NetJ11_2: J11.2 R20.2
NetJ11_3: J11.3 R13.1 R22.2 R37.2
NetJ11_4: J11.4 R19.1
NetJ11_5: J11.5 R21.1
NetJ11_7: J11.7 R67.2
NetJ11_8: J11.8 R66.2
NetJ11_9: J11.9 R65.1
NetJ11_10: J11.10 R71.1
NetJ11_12: J11.12 R118.2
NetJ11_13: J11.13 R114.2
NetJ11_14: J11.14 R113.1
NetJ11_15: J11.15 R119.1
NetJ11_17: J11.17 R165.2
NetJ11_18: J11.18 R164.2
NetJ11_19: J11.19 R163.1
NetJ11_20: J11.20 R166.1
NetJ11_23: J11.23 R18.2
NetJ11_24: J11.24 R14.1 R27.2 R40.2
NetJ11_28: J11.28 R63.1 R74.2 R84.2
NetJ11_29: J11.29 R64.1 R77.2 R87.2
NetJ11_33: J11.33 R111.1 R122.2 R135.2
NetJ11_34: J11.34 R112.1 R125.2 R138.2
NetJ11_38: J11.38 R161.1 R174.2 R184.2
NetJ11_39: J11.39 R162.1 R177.2 R187.2
NetJ11_43: J11.43 R204.1
NetJ11_44: J11.44 R206.1
NetJ11_45: J11.45 R227.2
NetJ11_46: J11.46 R231.2
NetJ11_47: J11.47 R225.2
NetJ11_48: J11.48 R229.2
NetJ11_49: J11.49 R226.2
NetJ11_50: J11.50 R230.2
NetJ11_51: J11.51 R228.2
NetJ11_52: J11.52 R232.2
NetJ11_53: J11.53 R201.1
NetJ11_54: J11.54 R202.1
NetJ11_55: J11.55 R203.1
NetJ11_56: J11.56 R205.1
NetR128_2: R128.2 R143.2
NetR129_2: R129.2 R144.2
TGND: J10.1 J10.2 J10.6 J10.9 J10.13 J10.16 J10.22 J10.42 J10.46 J10.53 J10.63 J10.64 R15.1 R16.1 R17.1 R25.1 R26.1 R34.1 R35.1 R36.1 R43.1 R44.1 R49.1 R50.1 R68.1 R69.1 R70.1 R72.1 R73.1 R90.1 R91.1 R92.1 R93.1 R94.1 R115.1 R116.1 R117.1 R120.1 R121.1 R132.1 R133.1 R134.1 R141.1 R142.1 R147.1 R148.1 R167.1 R168.1 R169.1 R170.1 R171.1 R172.1 R173.1 R190.1 R191.1 R192.1
V3GND: Ic1.18 Ic4.18 Ic17.18 Ic19.18 Ic32.18 Ic35.18 Ic47.18 Ic50.18
pads on no net: Ic5.13 Ic5.14 Ic5.15 Ic5.16 Ic5.17 Ic5.18 Ic5.19 Ic5.20 Ic6.7 Ic6.8 Ic7.13 Ic7.14 Ic7.15 Ic7.16 Ic7.17 Ic7.18 Ic7.19 Ic7.20 Ic8.13 Ic8.14 Ic8.15 Ic8.16 Ic8.17 Ic8.18 Ic8.19 Ic8.20 Ic11.7 Ic11.8 Ic13.6 Ic13.13 Ic20.13 Ic20.14 Ic20.15 Ic20.16 Ic20.17 Ic20.18 Ic20.19 Ic20.20 Ic21.7 Ic21.8 Ic22.13 Ic22.14 Ic22.15 Ic22.16 Ic22.17 Ic22.18 Ic22.19 Ic22.20 Ic23.13 Ic23.14 Ic23.15 Ic23.16 Ic23.17 Ic23.18 Ic23.19 Ic23.20 Ic26.7 Ic26.8 Ic28.6 Ic28.13 Ic36.13 Ic36.14 Ic36.15 Ic36.16 Ic36.17 Ic36.18 Ic36.19 Ic36.20 Ic37.7 Ic37.8 Ic38.13 Ic38.14 Ic38.15 Ic38.16 Ic38.17 Ic38.18 Ic38.19 Ic38.20 Ic39.13 Ic39.14 Ic39.15 Ic39.16 Ic39.17 Ic39.18 Ic39.19 Ic39.20 Ic42.7 Ic42.8 Ic44.6 Ic44.13 Ic51.13 Ic51.14 Ic51.15 Ic51.16 Ic51.17 Ic51.18 Ic51.19 Ic51.20 Ic52.7 Ic52.8 Ic53.13 Ic53.14 Ic53.15 Ic53.16 Ic53.17 Ic53.18 Ic53.19 Ic53.20 Ic54.13 Ic54.14 Ic54.15 Ic54.16 Ic54.17 Ic54.18 Ic54.19 Ic54.20 Ic57.7 Ic57.8 Ic59.6 Ic59.13 Ic65.5 Ic66.5 Ic67.5 Ic68.5

## Polygon pours and split planes (outlines as drawn)
no net on Internal Plane 1 (split plane): 387.54,35.16 -17.4,35.16 -17.4,230.49 387.54,230.49
no net on Internal Plane 2 (split plane): 387.54,35.16 -17.4,35.16 -17.4,230.49 387.54,230.49

## Text inside footprints (layer, text, board x,y; h text height)
J10: Top Overlay "62" at 400.384,42.513 h1.5 r90; Top Overlay "43" at 400.384,93.913 h1.5 r90; Top Overlay "21" at 405.584,40.913 h1.5 r90; Top Overlay "1" at 405.534,94.913 h1.5 r90
J11: Top Overlay "62" at -11.95,138.96 h1.5 r90; Top Overlay "43" at -11.95,190.36 h1.5 r90; Top Overlay "21" at -6.75,137.36 h1.5 r90; Top Overlay "1" at -6.8,191.36 h1.5 r90